# Altium PCB PCB1.PcbDoc
Units mil, origin at the board's own origin, x right, y up, seen from the top; angles counter-clockwise.
Board outline 3553.34 x 4922.63 mil, 2 copper layers (Top Layer, Bottom Layer); 17 components, 34 nets, 83 pads, 6 vias.
Unrouted connection lines stored in the file: 3.
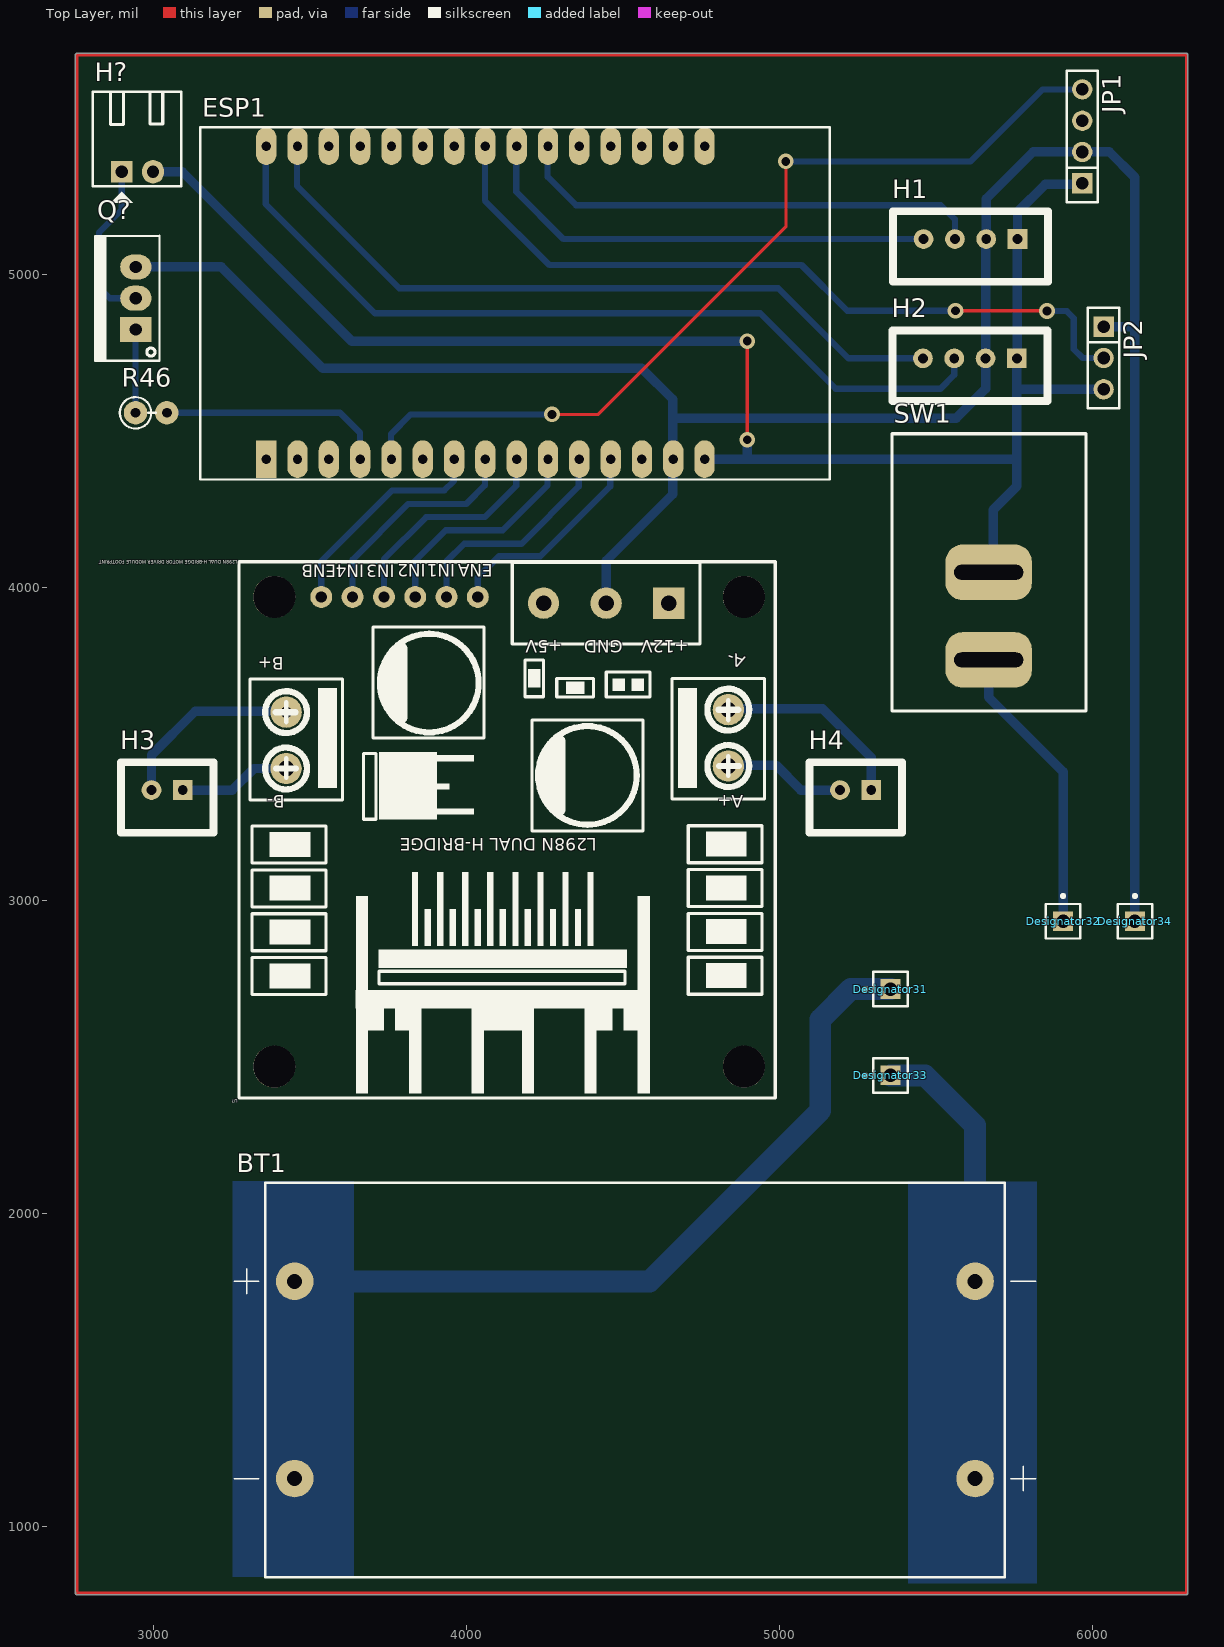
[diagram p0: Top Layer view]
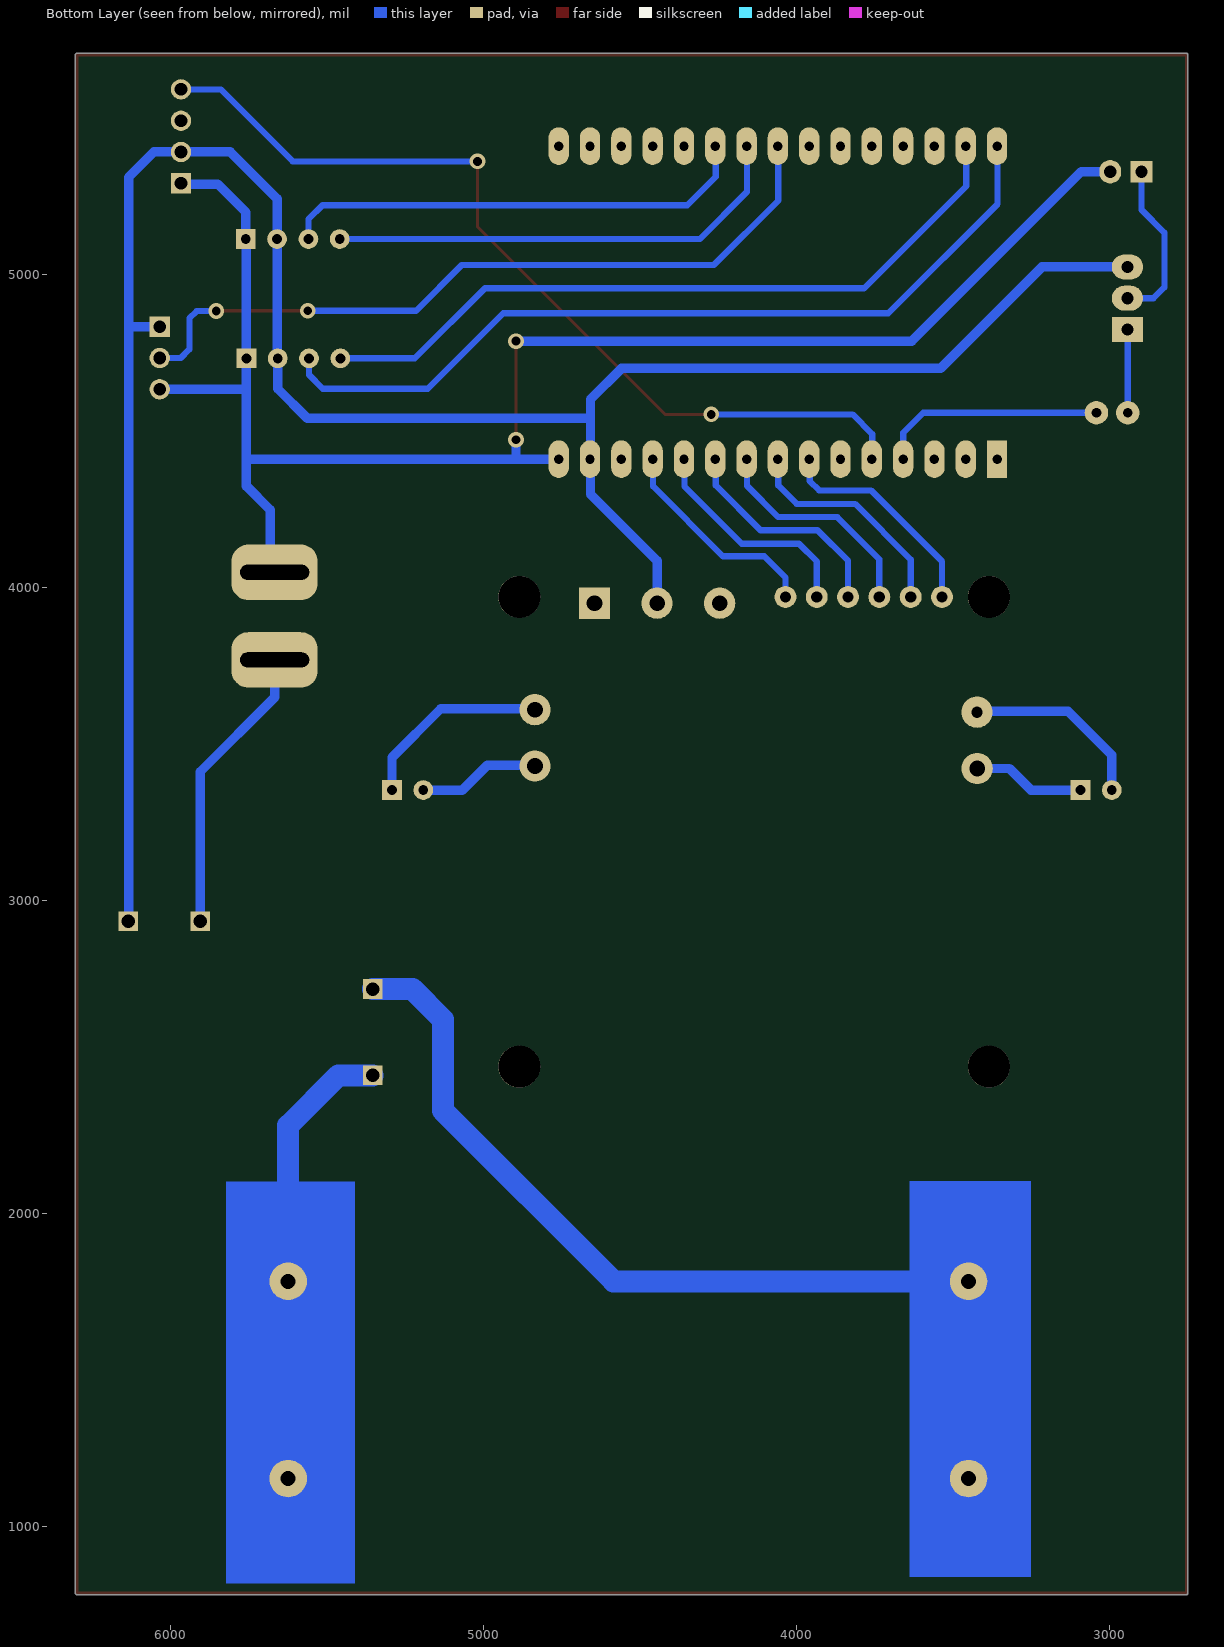
[diagram p1: Bottom Layer view, seen from below]

## Layer stack, top to bottom
Top Solder: solder mask 0.4, Solder Resist, Dk 3.5
Top Layer: signal copper 1.4
Dielectric 1: dielectric 12.6, FR-4, Dk 4.8
Bottom Layer: signal copper 1.4
Bottom Solder: solder mask 0.4, Solder Resist, Dk 3.5

## Board outline
2751.45,789.7 cw(c2755.91,792) 2750.89,792 2750.89,5700 cw(c2755.91,5700) 2755.91,5705.02 6299.21,5705.02 cw(c6299.21,5700) 6304.23,5700 6304.23,787.4 cw(c6299.21,787.4) 6299.21,782.39 2755.91,782.39 cw(c2755.91,787.4)

## Design rules (kind name [scope] priority, off if disabled: settings)
Clearance [All] p1: gap=10 ignorepadtopadclearanceinfootprint=FALSE except(0: Arc-Hole Track-Hole SMDPad-Hole THPad-Hole Via-Hole Fill-Hole Poly-Hole Region-Hole Text-Hole)
PolygonConnect [All] p1: connectstyle=Relief reliefconductorwidth=10 reliefentries=4 polygonreliefangle="90 Angle" airgapwidth=10
RoutingVias [All] p1: holewidth=28 width=50 viastyle="Through Hole" minholewidth=28 minwidth=50 maxholewidth=28 maxwidth=50
SolderMaskExpansion [All] p1: expansion=4
Width [All] p1: maxlimit=10 minlimit=10 preferedwidth=10
30 further rules are at their usual default settings.

## Classes and differential pairs
component class Sheet1: BT1 ESP1 H1 H2 H3 H4 H? JP1 JP2 Q? R46 SW1

## Components (designator, comment, footprint, x,y, rotation, side; value= is the part's Value field where it differs from the comment)
BT1 "18650" "DE PIN 18650 X2" 4538,1468 r0 top
Designator31 "Comment" "JP 1x1 DT" 5354.33,2716.54 r90 top
Designator32 "Comment" "JP 1x1 DT" 5905.51,2933.07 r0 top
Designator33 "Comment" "JP 1x1 DT" 5354.33,2440.94 r90 top
Designator34 "Comment" "JP 1x1 DT" 6135,2933.07 r0 top
ESP1 "ESP32 DEVKIT" "ESP32 WROOM 32 KIT" 3360.45,4409 r90 top
H1 "Header 4P 2.54 Duc Thang" XH2.54M-4 5760,5112 r180 top
H2 "Header 4P 2.54 Duc Thang" XH2.54M-4 5758,4731 r180 top
H3 "Header 2P 2.54 Duc Thang" XH2.54M-2 3094,3352 r180 top
H4 "Header 2P 2.54 Duc Thang" XH2.54M-2 5293,3352 r180 top
H? "Header 2P 2.54 Duc Cong" "Header 2P DC 2.54" 2899,5327 r90 top
JP1 "JP 1x4 2.54" "JP 1x4 CT" 5967,5290 r90 top
JP2 "JP 1x3 2.54" "JP 1x3 CT" 6035,4832 r270 top
Q? "TIP41C" QTO-220 2944,4823 r90 top
R46 "Res1" R1/4W1 2943,4557 r0 top value=1K
SW1 "ROCKET SWITCH-10A" SW_2ARS_TH 5669,3770 r180 top
U? "L298N DUAL H-BRIDGE MOTOR DRIVER MODULE FOOTPRINT" "L298N DUAL H-BRIDGE MOTOR DRIVER MODULE FOOTPRINT" 4130,3225.15 r180 top

## Footprints (in the part's own frame and the unit in brackets; to place one, negate y for a bottom-side part, rotate by r counter-clockwise, add the part's x,y. Pads: shape width x height; smd on the part's side, far side on the other; paste and mask are expansions set on the pad)
"DE PIN 18650 X2" [mil] "2-cell AA battery holder"
  round 120 hole 48: 1(-1086.61,314.96) 1(1086.61,314.96) 2(-1086.61,-314.96) 2(1086.61,-314.96)
  silkscreen extent -1280,-630 1280,630, body extent -1181,-630 1181,630, height 657
"ESP32 WROOM 32 KIT" [mil]
  rect 120x65 hole 30: 1(0,0)
  oval 120x65 hole 30: 2(0,-100) 3(0,-200) 4(0,-300) 5(0,-400) 6(0,-500) 7(0,-600) 8(0,-700) 9(0,-800) 10(0,-900) 11(0,-1000) 12(0,-1100) 13(0,-1200) 14(0,-1300) 15(0,-1400) 16(1000,-1400) 17(1000,-1300) 18(1000,-1200) 19(1000,-1100) 20(1000,-1000) 21(1000,-900) 22(1000,-800) 23(1000,-700) 24(1000,-600) 25(1000,-500) 26(1000,-400) 27(1000,-300) 28(1000,-200) 29(1000,-100) 30(1000,0)
  silkscreen extent -65,-1800 1060,210, body extent -65,-1795 1057,210, height 413
"Header 2P DC 2.54" [mil]
  rect 70x70 hole 39.37 unplated: 1(0,0)
  oval 75x70 hole 39.37 unplated: 2(0,-100)
  silkscreen extent -100,-190 255,93, body extent -50,-190 250,90, height 237
"JP 1x1 DT" [mm] "1pins, 1 row, straight, gold plating"
  rect 1.6x1.6 hole 1.1: 1(0,0)
  silkscreen extent -1.4,-1.4 1.4,2.17, body extent -1.27,-1.27 1.27,1.27, height 8.54
"JP 1x3 CT" [mil]
  rect 65x65 hole 40.16: 1(0,0)
  round 65 hole 40.16: 2(100,0) 3(200,0)
  silkscreen extent -60,-50 260,50, body extent -60,-49 260,49, height 335
"JP 1x4 CT" [mil]
  rect 65x65 hole 40.16: 1(0,0)
  round 65 hole 40.16: 2(100,0) 3(200,0) 4(300,0)
  silkscreen extent -60,-50 360,50, body extent -60,-49 360,49, height 335
"L298N DUAL H-BRIDGE MOTOR DRIVER MODULE FOOTPRINT" [mil]
  round 100 hole 50 paste+0 mask+4: +5V(-116.3,-723.7) GND(-316.3,-723.7)
  rect 100x100 hole 50 paste+0 mask+4: +12V(-516.3,-723.7)
  round 70 hole 36 paste+0 mask+4: ENA(93.7,-743.7) ENB(593.7,-743.7) IN1(193.7,-743.7) IN2(293.7,-743.7) IN3(393.7,-743.7) IN4(493.7,-743.7)
  round 100 hole 50 paste+0 mask+2: OUT1(-706.3,-203.7) OUT2(-706.3,-383.7) OUT4(706.06,-195.79)
  round 100 hole 36 paste+0 mask+2: OUT3(705.7,-375.7)
  round 133.86 hole 133.86 unplated paste+0: ""(-756.3,756.3) ""(-756.3,-743.7) ""(743.7,756.3) ""(743.7,-743.7)
  silkscreen extent -856,-856 856,856
QTO-220 [mil] "TO-220 - 1-2-3"
  rect 80x100 hole 39: 1(0,0)
  oval 80x100 hole 39: 2(100,0) 3(200,0)
  silkscreen extent -100,-76 300,130, body extent -119,-64 322,121, height 755
R1/4W1 [mm] "R 1/4W, 2 Pin, 150mil"
  round 1.905 hole 0.8: 1(0,0) 2(2.54,0)
  silkscreen extent -1.27,-1.28 1.65,1.28, body extent -0.89,-0.92 2.82,0.92, height 7.3
SW_2ARS_TH [mm] "CASE: TH"
  rrect60% 7x4.5 hole 1.2 slot 5.6 at 0 deg mask+0.076: 1(0.025,0.051) 2(0.025,-7.049)
  silkscreen extent -7.87,-18.29 7.87,4.19, body extent -7.47,-17.9 7.53,3.8, height 17.81
XH2.54M-2 [mm]
  rect 1.6x1.6 hole 0.8: 1(0,0)
  round 1.6 hole 0.8: 2(2.54,0)
  silkscreen extent -2.48,-2.26 5.02,3.46, body extent -2.48,-2.26 5.02,3.48, height 6.91
XH2.54M-4 [mm]
  rect 1.6x1.6 hole 0.8: 1(0,0)
  round 1.6 hole 0.8: 2(2.54,0) 3(5.08,0) 4(7.62,0)
  silkscreen extent -2.48,-2.26 10.1,3.46, body extent -2.48,-2.26 10.1,3.48, height 6.91

## Part data
BT1: library part "De Pin 18650 x2", "De Pin 18650 x2", Ma_Hang=MH010812, Ten="H?p Ð? Pin 18650 Hàn M?ch DP 18650-HM-02"
ESP1: library part "ESP32 WROOM 32 KIT"
H1 H2 H3 H4 H?: "C?m", Chung_Loai=C?m, Don_Vi=Con
  H1 H2: Ma_Hang=MH001285, Ten_Linh_Kien="Header 4P XH2.54-4P Ð?c Th?ng"
  H3 H4: Ma_Hang=MH001283, Ten_Linh_Kien="Header 2P XH2.54-2P Ð?c Th?ng"
  H?: Ma_Hang=MH002852, Ten_Linh_Kien="Header 2P XH2.54-2P Ð?c Cong"
JP1: library part "JP 1x4 2.54 Cai Thang", "C?m", Chung_Loai=C?m, Don_Vi=Con, Ma_Hang=MH004006, Ten_Linh_Kien="Jump Ðõn Cái 2.54MM 1x20P Th?ng"
JP2: library part "JP 1x3 2.54 Cai Thang", "C?m", Chung_Loai=C?m, Don_Vi=Con, Ma_Hang=MH004006, Ten_Linh_Kien="Jump Ðõn Cái 2.54MM 1x20P Th?ng"
Q?: "NPN 2W, BCE", =H1061
R46: library part Res1_1, "Resistor", Manufacturer="Generic Components", Class=Passive, Published=08/06/2000, Publisher="Altium Hobart Technology Centre", SubClass=Resistor
SW1: library part SW1_10A-SRB23A2BBBNN-TH, "Rocker Switch SPDT 10A (AC) 125V Panel Mount, Snap-In", Alternate Part Number-1=NA, Case/Package=TH, Manufacturer="ITT C&K", Manufacturer Part Number=SRB23A2BBBNN, Supplier-1="SP ROAD", Supplier Part Number-1=SRB23A2BBBNN

## Via types
v1: diameter 50, hole 28, Top Layer to Bottom Layer, 6 vias

## Nets (pads, with @x,y where several pads share a name; then routed paths per layer and width w, separated by ;. In a path a pad name is that pad's centre, name@x,y a point inside that pad or via, vN(x,y) a via of type N, cw(c..) or ccw(c..) an arc to the next point about the centre after c; other vN are vias at no path point)
5_d: SW1.1 | length 933.3
  Bottom Layer w30: SW1.1 5668,3648 5905.51,3410.49 5905.51,2933.07
5am: ESP1.14 ESP1.17 H1.2 H2.2 Q?.3 U?.GND | length 7318.7
  Bottom Layer w30: Q?.3 3217,5023 3541,4699 4560,4699 4659,4600 4659,4540 ; U?.GND@4446.3,3951.7 4446.3,4084.3 4659,4297 4659,4540 ; 6035,4832 6130,4832 6134,4828 ; 6134,2934 6134,4828 ; 4659,4540 5564,4540 5658,4634 H2.2 5659,4732 5659,5111 H1.2 5660,5241 5810,5391 6053,5391 6134,5310 6134,4828
18650_am: BT1.2
18650_d: BT1.1
A0: 
D0: JP1.3
D2: ESP1.19
D5: ESP1.23 JP2.2 | length 2416.3
  Top Layer w10: v1(5562,4883) 5853,4883 v1(5854,4882)
  Bottom Layer w20: ESP1.23@4059,5409 4059,5235 4265,5029 5070,5029 5216,4883 v1(5562,4883) ; v1(5854,4882) 5917,4882 5940,4859 5940,4760 5968,4732 JP2.2
D18: ESP1.24
D19: ESP1.25
D21: ESP1.26
D32: ESP1.6
D34: ESP1.4 R46.2 | length 727.7
  Bottom Layer w20: R46.2 3596,4557 3660,4493 3660,4409.45 ESP1.4
D35: ESP1.5 JP1.4 | length 2866.5
  Top Layer w10: v1(4273,4552) 4421,4552 5020,5151 v1(5020,5360)
  Bottom Layer w20: ESP1.5@3759,4409 3759,4489 3822,4552 v1(4273,4552) ; v1(5020,5360) 5610,5360 5840,5590 JP1.4
D44: ESP1.20
IN1: ESP1.11 U?.IN1 | length 719.6
  Bottom Layer w20: U?.IN1@3936.3,3971.7 3936.3,4082.3 3993,4139 4176,4139 4359,4322 ESP1.11@4359,4409
IN2: ESP1.10 U?.IN2 | length 719
  Bottom Layer w20: U?.IN2@3836.3,3971.7 3836.3,4084.3 3934,4182 4116,4182 4259,4325 ESP1.10@4259,4409
IN3: ESP1.9 U?.IN3 | length 722.5
  Bottom Layer w20: U?.IN3@3736.3,3971.7 3736.3,4089.3 3871,4224 4059,4224 4159,4324 ESP1.9@4159,4409
IN4: ESP1.8 U?.IN4 | length 721.3
  Bottom Layer w20: U?.IN4@3636.3,3971.7 3636.3,4088.3 3814,4266 4000,4266 4059,4325 ESP1.8@4059,4409
NA: ESP1.12 U?.ENA | length 689.7
  Bottom Layer w20: U?.ENA@4036.3,3971.7 4036.3,4031.3 4104,4099 4236,4099 4459,4322 ESP1.12@4459,4409
NB: ESP1.7 U?.ENB | length 709.6
  Bottom Layer w20: U?.ENB@3536.3,3971.7 3536.3,4082.3 3763,4309 3929,4309 3959,4339 ESP1.7@3959,4409
NetESP1_15: ESP1.15 H1.1 H2.1 H?.2 SW1.2 | length 5204.6
  Top Layer w10: v1(4897,4471) v1(4897,4786)
  Bottom Layer w10: 4897,4412 4900,4409
  Bottom Layer w30: H?.2 3092,5327 3633,4786 v1(4897,4786) ; ESP1.15@4759,4409 4900,4409 5758,4409 ; 4897,4412 v1(4897,4471) ; SW1.2 5682,4061.53 5682,4247 5758,4323 5758,4409 ; 5764,4632 6035,4632 ; 5967,5290 5964,5287 5849,5287 5760,5198 H1.1 5759,5111 5759,4731 H2.1 5758,4409
NetESP1_29: ESP1.29 H2.4 | length 2354.7
  Bottom Layer w20: ESP1.29@3459,5409 3459,5281.16 3785.16,4955 4996,4955 5220,4731 H2.4
NetESP1_30: ESP1.30 H2.3 | length 2699.8
  Bottom Layer w20: ESP1.30@3359,5409 3359,5223.68 3707.68,4875 4938,4875 5179,4634 5514,4634 5558,4678 H2.3
NetH?_2: H?.1 Q?.2 | length 531.7
  Bottom Layer w20: H?.1 2899,5205 2826,5132 2826,4958 2861,4923 Q?.2
NetQ?_1: Q?.1 R46.1 | length 266.4
  Bottom Layer w10: Q?.1@2943,4822 Q?.1
  Bottom Layer w20: R46.1 Q?.1@2943,4822
out: 
out1: H3.2 U?.OUT3 | length 600.2
  Bottom Layer w30: H3.2 2994,3464 3133.7,3603.7 U?.OUT3@3424.3,3603.7
out2: H3.1 U?.OUT4 | length 355.6
  Bottom Layer w30: H3.1 3252,3352 3320.94,3420.94 U?.OUT4@3421.09,3420.94
out3: H4.2 U?.OUT1 | length 389.7
  Bottom Layer w30: U?.OUT1@4836.3,3431.7 4988.3,3431.7 5068,3352 H4.2
out4: H4.1 U?.OUT2 | length 625.2
  Bottom Layer w30: U?.OUT2@4836.3,3611.7 5137.3,3611.7 5293,3456 H4.1
out-led: ESP1.18
rx: ESP1.21 H1.3 | length 1518.3
  Bottom Layer w20: ESP1.21@4259,5409 4259,5311 4350,5220 5515,5220 5560,5175 H1.3
tx: ESP1.22 H1.4 | length 1509.5
  Bottom Layer w20: ESP1.22@4159,5409 4159,5263 4310,5112 H1.4
pads on no net: Designator31.1 Designator32.1 Designator33.1 Designator34.1 ESP1.1 ESP1.2 ESP1.3 ESP1.13 ESP1.16 ESP1.27 ESP1.28 JP1.1 JP1.2 JP2.1 JP2.3 U?. U?.+5V U?.+12V
copper on no net: | length 21461.4
  Top Layer w10: 2755.91,787.4 6299.21,787.4 6299.21,5700 2755.91,5700 2755.91,792
  Bottom Layer w70: 3451.39,1153.04 3451.39,1782.96 4584.96,1782.96 5130,2328 5130,2619 5227.54,2716.54 5354.33,2716.54 ; 5354.33,2440.94 5464.06,2440.94 5624.61,2280.39 5624.61,1782.96 5624.61,1153.04

## Other copper
Bottom Layer:
  rectangle: 5411,818 5823,2102
  rectangle: 3252,839 3640,2104

## Silkscreen, mask and mechanical layers (free items; w line width, h text height)
Mechanical 1:
  lines w10: 6296.25,2202 5312,2202 5312,2991 6300,2991 6300,2202
Mechanical 15:
  lines w0.1: 3685.19,3145.69 3685.21,3145.71 ; 3685.19,3168.69 3685.21,3168.71 ; 3688.19,3108.69 3688.21,3108.71 ; 3745.19,3154.69 3745.21,3154.71 ; 3984.79,3332.29 3984.81,3332.31 ; 4005.19,3226.69 4005.21,3226.71

## Text inside footprints (layer, text, board x,y; h text height)
U?: Top Overlay "B+" at 3416.3,3775.85 h40 r180; Top Overlay "B-" at 3419.3,3334.85 h40 r180; Top Overlay "A-" at 4893.14,3776.64 h40 r160; Top Overlay "A+" at 4884.3,3335.85 h40 r180; Top Overlay "L298N DUAL H-BRIDGE" at 4416.3,3198.85 h40 r180; Top Overlay "+5V" at 4306.3,3829.85 h40 r180; Top Overlay "GND" at 4499.3,3830.85 h40 r180; Top Overlay "+12V" at 4709.3,3830.85 h40 r180; Top Overlay "ENB" at 3583.3,4071.85 h40 r180; Top Overlay "IN4" at 3673.3,4071.85 h40 r180; Top Overlay "IN3" at 3771.3,4071.85 h40 r180; Top Overlay "IN2" at 3869.3,4072.85 h40 r180; Top Overlay "IN1" at 3964.3,4072.85 h40 r180; Top Overlay "ENA" at 4083.3,4072.85 h40 r180